# Allegro board pcb_layout.brd
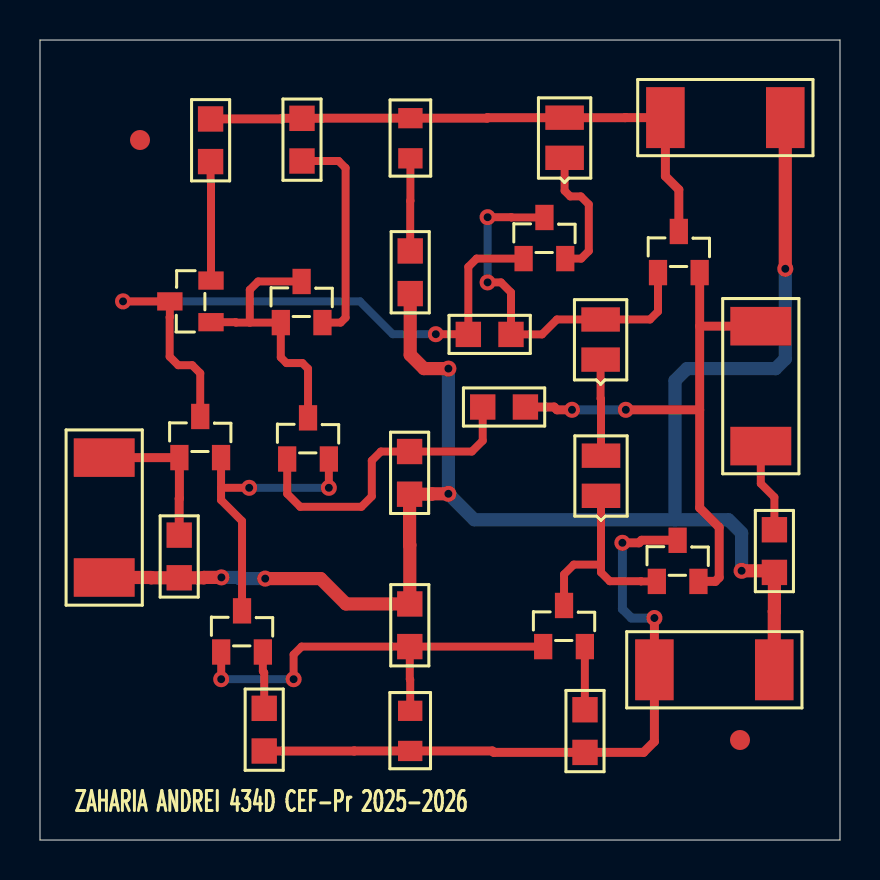
[diagram p0: board, top side]
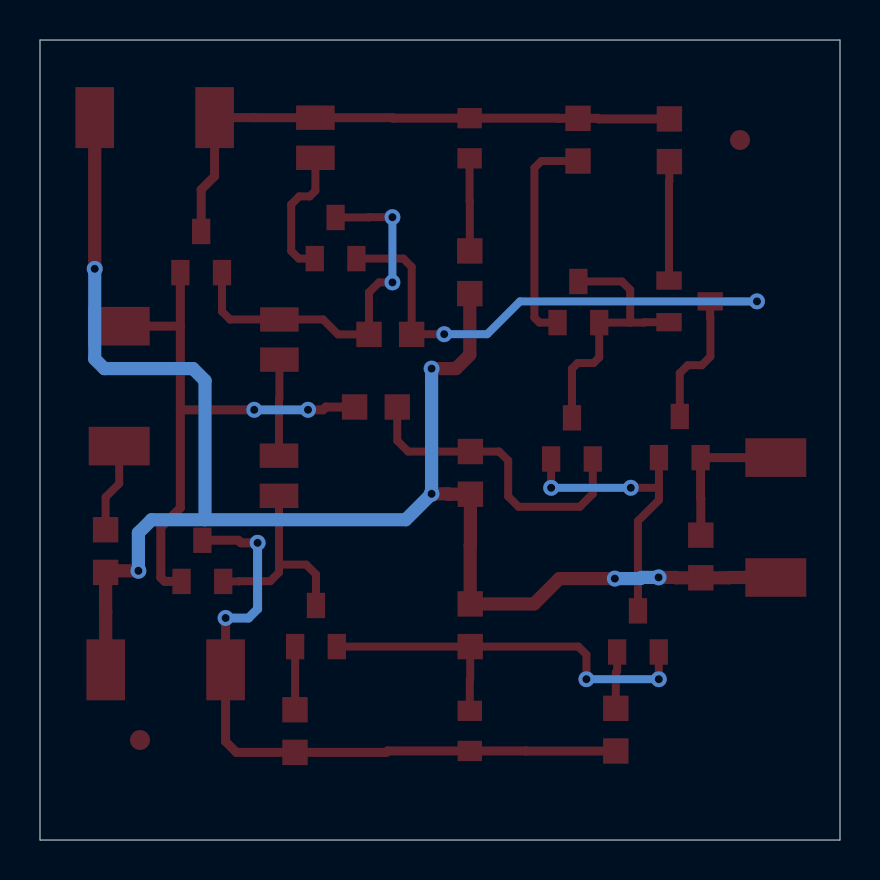
[diagram p1: board, bottom side, seen from below]

Outline 40 x 40 mm; copper layers: TOP, BOTTOM. Coordinates in mm from the lower left corner of the outline.
Outline path: 0,40 40,40 40,0 0,0 0,40

## Design rules (mm)
nets with their own width: min track width 0.4; nets N00132 N00232 N00236 N00304 N00308 N00463 N00751 N00776 N00805 N00974 N02343 N02545 N04934 N10696 N15695
nets with their own width: min track width 0.45; nets V+ V- VIN VOUT
nets with their own width: min track width 0.66; nets GND

## Placement (name value [footprint] x y rotation side)
C1  100p  [SMC0805]  23.55 25.28 180 top
D3  BZX84-C2V7  [SML0805]  18.51 6.46 270 top
D5  BZX84-C2V7  [SML0805]  18.52 36.09 270 top
J1  CON2  [SMR2512]  36.04 25.69 270 top
J2  CON2  [SMR2512]  3.21 19.12 270 top
J3  CON2  [SMR2512]  31.27 36.12 0 top
J4  CON2  [SMR2512]  30.72 8.51 0 top
NOREF  -  [unnamed]  35 5 0 top
NOREF#2  -  [#2]  40 0 90 top
NOREF#3  -  [#2]  0 40 0 top
NOREF#4  -  [unnamed]  5 35 0 top
Q1  QBC846B  [TO236AA]  6.97 19.12 270 top
Q2  QBC846B  [TO236AA]  12.36 19.05 270 top
Q3  QBC846B  [TO236AA]  9.06 9.4 270 top
Q4  QBC856B  [TO236AA]  8.55 25.89 0 top
Q5  QBC856B  [TO236AA]  12.04 25.87 270 top
Q6  QBC856B  [TO236AA]  24.18 29.07 270 top
Q9  QBC846B  [TO236AA]  25.16 9.67 270 top
Q10  QBC807-25  [TO236AA]  30.84 12.93 270 top
Q11  QBC817-25  [TO236AA]  30.9 28.37 270 top
R1  1k  [SMR0805]  8.53 33.92 90 top
R2  1k  [SMR0805]  13.1 33.95 90 top
R4  1k  [SMR0805]  18.48 17.29 90 top
R5  9.1k  [SMR0805]  24.27 21.65 180 top
R6  2.7k  [SMR0805]  11.21 4.45 90 top
R7  1k  [SMR0805]  27.25 4.38 90 top
R8  330k  [SMR0805]  6.96 13.11 90 top
R9  3.3k  [SMR0805]  18.49 9.67 90 top
R10  3.3k  [SMR0805]  18.51 27.32 90 top
RLOAD  150  [SMR0805]  36.72 13.38 90 top
U1  1N4148  [SMD0805]  28.03 24.02 90 top
U2  1N4148  [SMD0805]  28.05 17.21 90 top
U3  1N4148  [SMD0805]  26.23 34.11 90 top

## Library data of the parts
C1 = C
D3 D5 = BZX84-C2V7_0
J1-J4 = CON2
Q1-Q3 Q9 = QBC846B_0
Q4-Q6 = QBC856B_0
Q10 = QBC807-25_0
Q11 = QBC817-25_0
R1 R2 R4-R10 RLOAD = R
U1-U3 = 1N4148_4

## Footprints (pads in the part's own frame, mm; a bottom-side part is the same pattern mirrored in y, then rotated)
SMC0805
  rect 1.27x1.27 smd: 1(0,0) 2(2.134,0)
SMD0805
  rect 1.219x1.93 smd: A(2.007,0) C(0,0)
SML0805
  rect 1.016x1.219 smd: 1(0,0) 2(2.007,0)
SMR0805
  rect 1.27x1.27 smd: 1(0,0) 2(2.134,0)
SMR2512
  rect 1.93x3.048 smd: 1(0,0) 2(5.994,0)
TO236AA
  rect 1.27x0.914 smd: 1(0,0) 2(0,2.083) 3(-2.057,1.041)
unnamed
  round 1 smd: (0,0)

## Nets
GND: J2.2 J3.2 J4.2 R4.1 R8.1 R9.2 R10.1 RLOAD.1
VIN: J2.1 Q1.1 R8.2
V+: D5.1(C) J3.1 Q11.3 R1.2 R2.2 U3.A
V-: D3.2 J4.1 Q10.3 R6.1 R7.1
VOUT: J1.1 Q10.2(E) Q11.2(E) R5.1
N00132: Q1.2(E) Q2.2(E) Q3.3
N00232: Q2.3 Q4.1 Q5.1 Q5.3
N00236: C1.2 Q1.3 Q4.3 Q6.1
N00304: Q4.2(E) R1.1
N00308: Q5.2(E) R2.1
N00463: Q2.1 R4.2 R5.2
N00751: C1.1 Q6.3 Q11.1 U1.A
N00776: U1.C(2) U2.A
N00805: Q3.2(E) R6.2
N00974: Q9.3 Q10.1 U2.C(2)
N02343: Q9.2(E) R7.2
N02545: D3.1(C) Q3.1 Q9.1 R9.1
N04934: Q6.2(E) U3.C(2)
N10696: D5.2 R10.2
N15695: J1.2 RLOAD.2

## Via types
v1: diameter 0.8, hole 0.4, TOP to BOTTOM, 18 vias

## Routing (per net, layer and track width the routed paths; a pad name or vN(x,y) marks a point on that pad's centre or on a via; arc(x,y) is an arc through that point)
GND: length 83.7
  TOP w0.66: v1(11.26,13.07) 14.03,13.07 15.3,11.8 R9.2 18.49,14.74 18.48,14.75 R4.1 19.57,17.29 19.59,17.31 v1(20.42,17.31) ; J3.2 v1(37.26,28.56) ; R10.1 18.51,24.26 19.2,23.57 v1(20.42,23.57) ; v1(9.07,13.13) 8.21,13.13 8.19,13.11 R8.1 5.56,13.11 5.54,13.13 J2.2 ; J4.2 36.71,11.42 36.72,11.43 RLOAD.1 36.72,13.46 v1(35.08,13.46)
  BOTTOM w0.66: v1(9.07,13.13) 9.93,13.13 9.99,13.07 v1(11.26,13.07) ; v1(20.42,23.57) v1(20.42,17.31) 21.72,16.01 31.75,16.01 ; 31.75,16.01 31.75,22.97 32.35,23.57 36.78,23.57 37.26,24.05 v1(37.26,28.56) ; 31.75,16.01 34.42,16.01 35.08,15.35 v1(35.08,13.46)
VIN: length 7.6
  TOP w0.45: R8.2 6.96,17.07 6.97,17.08 Q1.1 J2.1
V+: length 28.7
  TOP w0.45: Q11.3 31.94,32.52 31.27,33.19 J3.1 29.27,36.12 29.27,36.12 U3.A 22.38,36.12 22.35,36.09 D5.1 14.09,36.09 14.09,36.08 R2.2 12.11,36.08 12.08,36.05 R1.2
V-: length 33.9
  TOP w0.45: Q10.3 30.08,14.99 29.95,14.86 v1(29.12,14.86) ; v1(30.72,11.1) J4.1 30.72,4.92 30.18,4.38 R7.1 22.69,4.38 22.62,4.45 D3.2 15.71,4.45 15.71,4.45 R6.1
  BOTTOM w0.45: v1(29.12,14.86) 29.12,11.55 29.57,11.1 v1(30.72,11.1)
VOUT: length 28.6
  TOP w0.45: 32.98,25.69 Q11.2 ; 32.98,25.69 32.98,21.51 ; 32.98,25.69 J1.1 ; Q10.2 33.77,12.93 33.96,13.12 33.96,15.63 32.98,16.61 32.98,21.51 ; 32.98,21.51 v1(29.29,21.51) ; v1(26.6,21.51) 25.85,21.51 25.71,21.65 R5.1
  BOTTOM w0.45: v1(26.6,21.51) v1(29.29,21.51)
N00132: length 14.9
  TOP w0.4: Q3.3 10.1,15.95 9.05,17 9.05,17.61 ; 9.05,17.61 Q1.2 ; 9.05,17.61 v1(10.46,17.61) ; v1(14.44,17.61) Q2.2
  BOTTOM w0.4: v1(14.44,17.61) v1(10.46,17.61)
N00232: length 13.7
  TOP w0.4: 10.49,25.87 Q5.1 12.04,24.13 12.32,23.85 13.12,23.85 13.4,23.56 Q2.3 ; 10.49,25.87 9.8,25.87 9.78,25.89 Q4.1 ; 10.49,25.87 10.49,27.51 10.91,27.93 Q5.3
N00236: length 33.4
  TOP w0.4: v1(19.79,25.29) 21.41,25.29 C1.2 21.42,28.66 21.83,29.07 Q6.1 ; Q1.3 8.01,23.34 7.61,23.74 6.91,23.74 6.48,24.17 6.48,26.14 6.49,26.15 Q4.3 v1(4.15,26.93)
  BOTTOM w0.4: v1(19.79,25.29) 17.64,25.29 16,26.93 v1(4.15,26.93)
N00304: length 6
  TOP w0.4: Q4.2 8.55,32.94 8.53,32.96 R1.1
N00308: length 11.1
  TOP w0.4: R2.1 14.93,33.95 15.28,33.6 15.28,26.12 15.03,25.87 Q5.2
N00463: length 15.9
  TOP w0.4: R5.2 22.14,19.97 21.59,19.42 R4.2 17.04,19.42 16.59,18.97 16.59,17.18 16.07,16.66 13.01,16.66 12.36,17.31 Q2.1
N00751: length 19.4
  TOP w0.4: v1(22.38,31.14) 23.56,31.14 23.57,31.13 Q6.3 ; v1(22.38,27.88) 23.05,27.88 23.55,27.38 C1.1 25.1,25.28 25.85,26.03 U1.A 30.5,26.03 30.9,26.43 Q11.1
  BOTTOM w0.4: v1(22.38,27.88) v1(22.38,31.14)
N00776: length 4.8
  TOP w0.4: U1.C 28.03,22.07 28.05,22.05 U2.A
N00805: length 2.8
  TOP w0.4: R6.2 11.21,8.37 11.14,8.44 Q3.2
N00974: length 10.4
  TOP w0.4: 28.05,13.77 26.69,13.77 26.2,13.28 Q9.3 ; 28.05,13.77 28.05,13.38 28.49,12.94 30.05,12.94 30.06,12.93 Q10.1 ; 28.05,13.77 U2.C
N02343: length 3.2
  TOP w0.4: R7.2 27.24,6.52 Q9.2
N02545: length 22.1
  TOP w0.4: R9.1 13.08,9.67 12.68,9.27 v1(12.68,8.04) ; R9.1 Q9.1 ; R9.1 18.49,8.04 18.51,8.02 D3.1 ; Q3.1 v1(9.06,8.04)
  BOTTOM w0.4: v1(9.06,8.04) v1(12.68,8.04)
N04934: length 6.8
  TOP w0.4: U3.C 26.23,32.46 26.51,32.18 27.04,32.18 27.44,31.78 27.44,29.45 27.06,29.07 Q6.2
N10696: length 4.6
  TOP w0.4: D5.2 18.52,31.96 18.51,31.95 R10.2
N15695: length 4.5
  TOP w0.4: J1.2 36.04,17.82 36.72,17.14 RLOAD.2

## Text on the board
Ref Des/Silkscreen Top: ZAHARIA ANDREI 434D CEF-Pr 2025-2026
XSECTION_CHART: FIGURE | FINISHED_SIZE | 0.4 | DRILL CHART: TOP to BOTTOM | ALL UNITS ARE IN MILLIMETERS | PLATED | QTY | 18 | *  SURFACE - AIR 0 MM | L1 TOP CONDUCTOR - COPPER 0.018 MM | *  DIELECTRIC - FR-4 1.564 MM | L2 BOTTOM CONDUCTOR - COPPER 0.018 MM | DESIGN CROSS SECTION CHART | ___________________________ | TOTAL THICKNESS 1.6 MM | 1-2
